# Altium PCB PCB_CONTROL.PcbDoc (part 8 of 15)
Units mil, origin at the board's own origin, x right, y up, seen from the top; angles counter-clockwise.
Board outline 7360.03 x 4773.15 mil, 2 copper layers (Top Layer, Bottom Layer); 73 components, 135 nets, 396 pads, 106 vias.
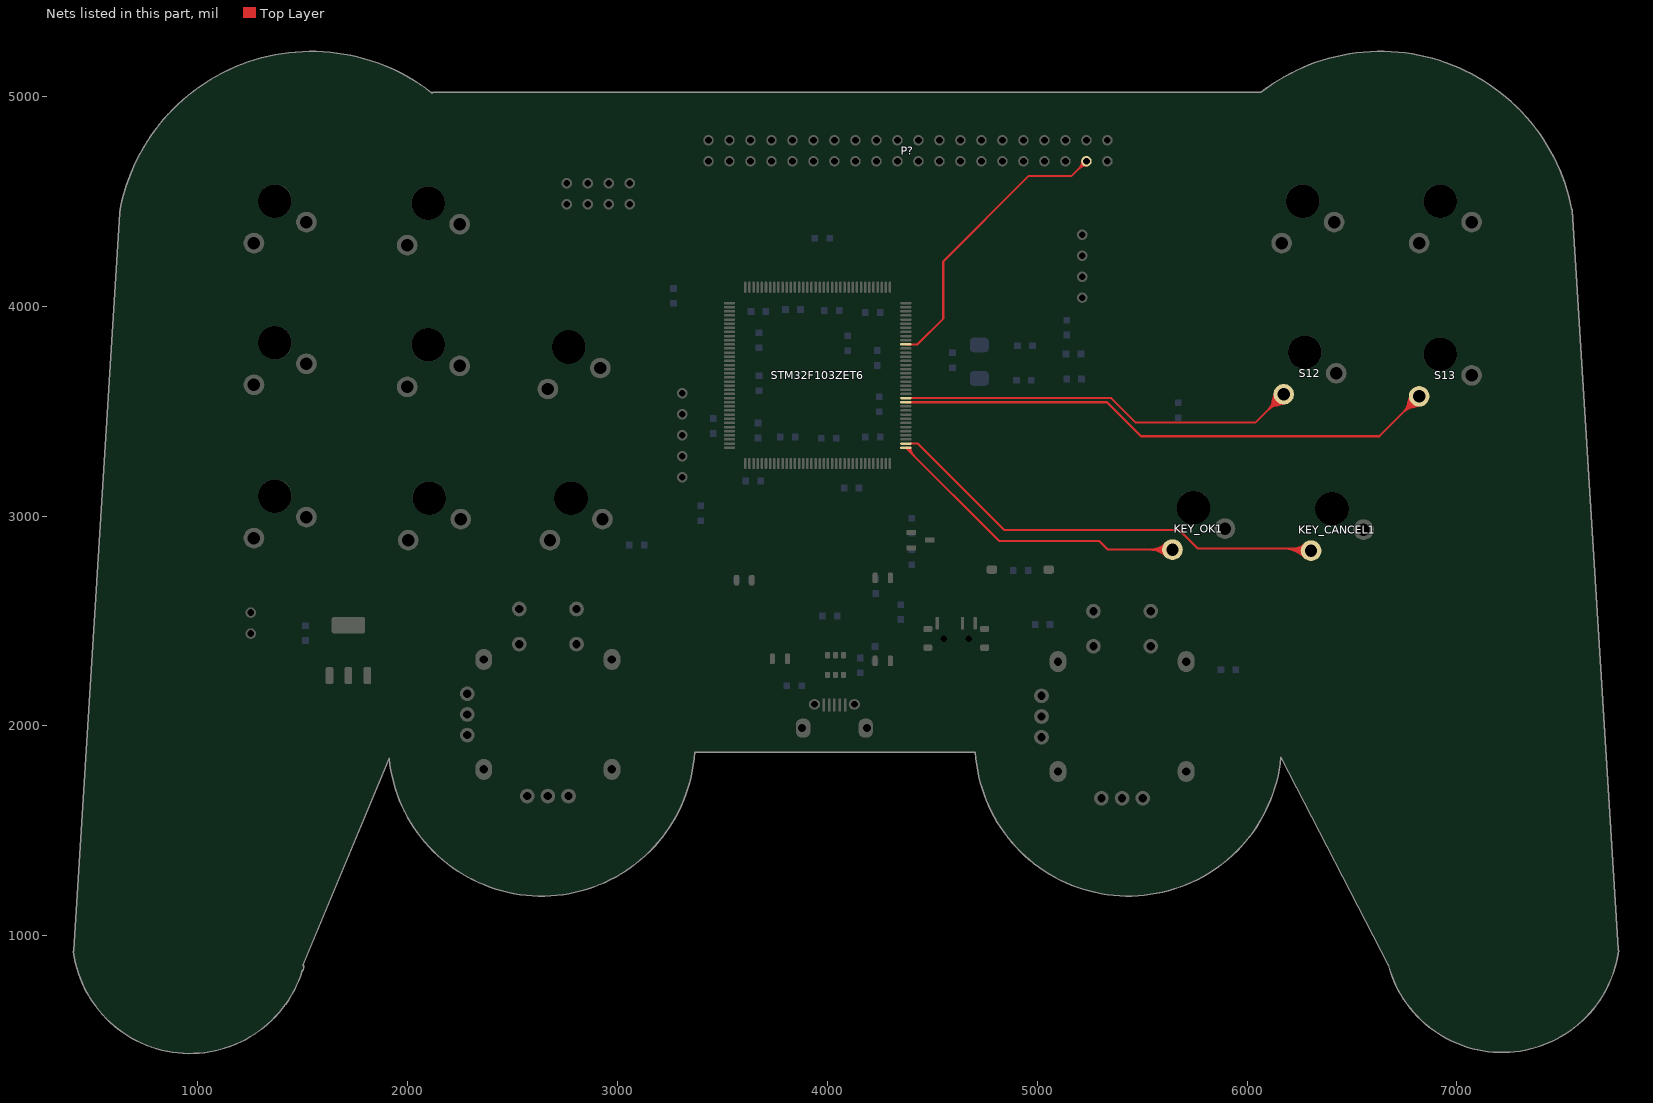
[diagram p8: the nets of this part, all layers, seen from the top]

## Via types
v1: diameter 20, hole 10, Top Layer to Bottom Layer, 104 vias
v2: diameter 30, hole 20, Top Layer to Bottom Layer, 2 vias

## Nets (pads, with @x,y where several pads share a name; then routed paths per layer and width w, separated by ;. In a path a pad name is that pad's centre, name@x,y a point inside that pad or via, vN(x,y) a via of type N, cw(c..) or ccw(c..) an arc to the next point about the centre after c; other vN are vias at no path point) (continued)
KEY_11: S12.2 STM32F103ZET6.13 | length 23886.4
  Top Layer w10: STM32F103ZET6.13@4375,3561.73 5353.27,3561.73 5470,3445 6040,3445 S12.2@6175,3580 ; STM32F103ZET6.13@4396,3561.73 4432,3561.73 ; STM32F103ZET6.13@4396,3561.73 4432,3561.73 ; STM32F103ZET6.13@4396,3561.73 4432,3561.73 ; 6099.52,3504.52 cw(c6175,3429.05) S12.2@6175,3535.79 ; 6099.52,3504.52 ccw(c6024.05,3580) S12.2@6130.79,3580 ; 6099.52,3504.52 ccw(c6024.05,3580) S12.2@6130.79,3580 ; 6099.52,3504.52 cw(c6175,3429.05) S12.2@6175,3535.79 ; 6099.52,3504.52 ccw(c6024.05,3580) S12.2@6130.79,3580 ; 6099.52,3504.52 cw(c6175,3429.05) S12.2@6175,3535.79 ; 6099.52,3504.52 ccw(c6024.05,3580) S12.2@6130.79,3580 ; 6099.52,3504.52 cw(c6175,3429.05) S12.2@6175,3535.79 ; 6099.52,3504.52 ccw(c6024.05,3580) S12.2@6130.79,3580 ; 6099.52,3504.52 cw(c6175,3429.05) S12.2@6175,3535.79 ; 6099.52,3504.52 ccw(c6024.05,3580) S12.2@6130.79,3580 ; 6099.52,3504.52 cw(c6175,3429.05) S12.2@6175,3535.79 ; 6099.52,3504.52 ccw(c6024.05,3580) S12.2@6130.79,3580 ; 6099.52,3504.52 cw(c6175,3429.05) S12.2@6175,3535.79 ; 6099.52,3504.52 ccw(c6024.05,3580) S12.2@6130.79,3580 ; 6099.52,3504.52 cw(c6175,3429.05) S12.2@6175,3535.79 ; 6116.6,3521.6 cw(c6175,3463.19) S12.2@6175,3545.79 ; 6116.6,3521.6 ccw(c6058.19,3580) S12.2@6140.79,3580 ; 6116.6,3521.6 ccw(c6058.19,3580) S12.2@6140.79,3580 ; 6116.6,3521.6 cw(c6175,3463.19) S12.2@6175,3545.79 ; 6116.6,3521.6 ccw(c6058.19,3580) S12.2@6140.79,3580 ; 6116.6,3521.6 cw(c6175,3463.19) S12.2@6175,3545.79 ; 6116.6,3521.6 ccw(c6058.19,3580) S12.2@6140.79,3580 ; 6116.6,3521.6 cw(c6175,3463.19) S12.2@6175,3545.79 ; 6116.6,3521.6 ccw(c6058.19,3580) S12.2@6140.79,3580 ; 6116.6,3521.6 cw(c6175,3463.19) S12.2@6175,3545.79 ; 6116.6,3521.6 ccw(c6058.19,3580) S12.2@6140.79,3580 ; 6116.6,3521.6 cw(c6175,3463.19) S12.2@6175,3545.79 ; 6116.6,3521.6 ccw(c6058.19,3580) S12.2@6140.79,3580 ; 6116.6,3521.6 cw(c6175,3463.19) S12.2@6175,3545.79 ; 6116.6,3521.6 ccw(c6058.19,3580) S12.2@6140.79,3580 ; 6116.6,3521.6 cw(c6175,3463.19) S12.2@6175,3545.79 ; 6118.29,3533.34 cw(c6188.4,3514.56) S12.2@6173.84,3585.67 ; 6118.29,3533.34 cw(c6188.4,3514.56) S12.2@6173.84,3585.67 ; 6118.29,3533.34 cw(c6188.4,3514.56) S12.2@6173.84,3585.67 ; 6118.29,3533.34 cw(c6188.4,3514.56) S12.2@6173.84,3585.67 ; 6118.29,3533.34 cw(c6188.4,3514.56) S12.2@6173.84,3585.67 ; 6118.29,3533.34 cw(c6188.4,3514.56) S12.2@6173.84,3585.67 ; 6118.29,3533.34 cw(c6188.4,3514.56) S12.2@6173.84,3585.67 ; 6118.29,3533.34 cw(c6188.4,3514.56) S12.2@6173.84,3585.67 ; 6118.29,3533.34 cw(c6188.4,3514.56) S12.2@6173.84,3585.67 ; 6118.29,3533.34 cw(c6188.4,3514.56) S12.2@6173.84,3585.67 ; 6118.29,3533.34 cw(c6188.4,3514.56) S12.2@6173.84,3585.67 ; 6118.29,3533.34 cw(c6188.4,3514.56) S12.2@6173.84,3585.67 ; 6118.29,3533.34 cw(c6188.4,3514.56) S12.2@6173.84,3585.67 ; 6118.29,3533.34 cw(c6188.4,3514.56) S12.2@6173.84,3585.67 ; 6118.29,3533.34 cw(c6188.4,3514.56) S12.2@6173.84,3585.67 ; 6118.29,3533.34 cw(c6188.4,3514.56) S12.2@6173.84,3585.67 ; 6118.29,3533.34 cw(c6188.4,3514.56) S12.2@6173.84,3585.67 ; 6118.29,3533.34 cw(c6188.4,3514.56) S12.2@6173.84,3585.67 ; 6118.29,3533.34 cw(c6188.4,3514.56) S12.2@6173.84,3585.67 ; 6118.29,3533.34 cw(c6188.4,3514.56) S12.2@6173.84,3585.67 ; 6118.29,3533.34 cw(c6188.4,3514.56) S12.2@6173.84,3585.67 ; 6118.29,3533.34 cw(c6188.4,3514.56) S12.2@6173.84,3585.67 ; 6118.29,3533.34 cw(c6188.4,3514.56) S12.2@6173.84,3585.67 ; 6118.29,3533.34 cw(c6188.4,3514.56) S12.2@6173.84,3585.67 ; 6118.29,3533.34 cw(c6188.4,3514.56) S12.2@6173.84,3585.67 ; 6118.29,3533.34 cw(c6188.4,3514.56) S12.2@6173.84,3585.67 ; 6118.29,3533.34 cw(c6188.4,3514.56) S12.2@6173.84,3585.67 ; 6118.29,3533.34 cw(c6188.4,3514.56) S12.2@6173.84,3585.67 ; 6122.47,3548.98 cw(c6184.77,3532.28) S12.2@6171.83,3595.47 ; 6122.47,3548.98 cw(c6184.77,3532.28) S12.2@6171.83,3595.47 ; 6122.47,3548.98 cw(c6184.77,3532.28) S12.2@6171.83,3595.47 ; 6122.47,3548.98 cw(c6184.77,3532.28) S12.2@6171.83,3595.47 ; 6122.47,3548.98 cw(c6184.77,3532.28) S12.2@6171.83,3595.47 ; 6122.47,3548.98 cw(c6184.77,3532.28) S12.2@6171.83,3595.47 ; 6122.47,3548.98 cw(c6184.77,3532.28) S12.2@6171.83,3595.47 ; 6122.47,3548.98 cw(c6184.77,3532.28) S12.2@6171.83,3595.47 ; 6122.47,3548.98 cw(c6184.77,3532.28) S12.2@6171.83,3595.47 ; 6122.47,3548.98 cw(c6184.77,3532.28) S12.2@6171.83,3595.47 ; 6122.47,3548.98 cw(c6184.77,3532.28) S12.2@6171.83,3595.47 ; 6122.47,3548.98 cw(c6184.77,3532.28) S12.2@6171.83,3595.47 ; 6122.47,3548.98 cw(c6184.77,3532.28) S12.2@6171.83,3595.47 ; 6122.47,3548.98 cw(c6184.77,3532.28) S12.2@6171.83,3595.47 ; 6122.47,3548.98 cw(c6184.77,3532.28) S12.2@6171.83,3595.47 ; 6122.47,3548.98 cw(c6184.77,3532.28) S12.2@6171.83,3595.47 ; 6122.47,3548.98 cw(c6184.77,3532.28) S12.2@6171.83,3595.47 ; 6122.47,3548.98 cw(c6184.77,3532.28) S12.2@6171.83,3595.47 ; 6122.47,3548.98 cw(c6184.77,3532.28) S12.2@6171.83,3595.47 ; 6122.47,3548.98 cw(c6184.77,3532.28) S12.2@6171.83,3595.47 ; 6122.47,3548.98 cw(c6184.77,3532.28) S12.2@6171.83,3595.47 ; 6122.47,3548.98 cw(c6184.77,3532.28) S12.2@6171.83,3595.47 ; 6122.47,3548.98 cw(c6184.77,3532.28) S12.2@6171.83,3595.47 ; 6122.47,3548.98 cw(c6184.77,3532.28) S12.2@6171.83,3595.47 ; 6122.47,3548.98 cw(c6184.77,3532.28) S12.2@6171.83,3595.47 ; 6122.47,3548.98 cw(c6184.77,3532.28) S12.2@6171.83,3595.47 ; 6122.47,3548.98 cw(c6184.77,3532.28) S12.2@6171.83,3595.47 ; 6122.47,3548.98 cw(c6184.77,3532.28) S12.2@6171.83,3595.47 ; 6126.66,3564.61 cw(c6181.14,3550.01) S12.2@6169.83,3605.26 ; 6126.66,3564.61 cw(c6181.14,3550.01) S12.2@6169.83,3605.26 ; 6126.66,3564.61 cw(c6181.14,3550.01) S12.2@6169.83,3605.26 ; 6126.66,3564.61 cw(c6181.14,3550.01) S12.2@6169.83,3605.26 ; 6126.66,3564.61 cw(c6181.14,3550.01) S12.2@6169.83,3605.26 ; 6126.66,3564.61 cw(c6181.14,3550.01) S12.2@6169.83,3605.26 ; 6126.66,3564.61 cw(c6181.14,3550.01) S12.2@6169.83,3605.26 ; 6126.66,3564.61 cw(c6181.14,3550.01) S12.2@6169.83,3605.26 ; 6126.66,3564.61 cw(c6181.14,3550.01) S12.2@6169.83,3605.26 ; 6126.66,3564.61 cw(c6181.14,3550.01) S12.2@6169.83,3605.26 ; 6126.66,3564.61 cw(c6181.14,3550.01) S12.2@6169.83,3605.26 ; 6126.66,3564.61 cw(c6181.14,3550.01) S12.2@6169.83,3605.26 ; 6126.66,3564.61 cw(c6181.14,3550.01) S12.2@6169.83,3605.26 ; 6126.66,3564.61 cw(c6181.14,3550.01) S12.2@6169.83,3605.26 ; 6126.66,3564.61 cw(c6181.14,3550.01) S12.2@6169.83,3605.26 ; 6126.66,3564.61 cw(c6181.14,3550.01) S12.2@6169.83,3605.26 ; 6126.66,3564.61 cw(c6181.14,3550.01) S12.2@6169.83,3605.26 ; 6126.66,3564.61 cw(c6181.14,3550.01) S12.2@6169.83,3605.26 ; 6126.66,3564.61 cw(c6181.14,3550.01) S12.2@6169.83,3605.26 ; 6126.66,3564.61 cw(c6181.14,3550.01) S12.2@6169.83,3605.26 ; 6126.66,3564.61 cw(c6181.14,3550.01) S12.2@6169.83,3605.26 ; 6126.66,3564.61 cw(c6181.14,3550.01) S12.2@6169.83,3605.26 ; 6126.66,3564.61 cw(c6181.14,3550.01) S12.2@6169.83,3605.26 ; 6126.66,3564.61 cw(c6181.14,3550.01) S12.2@6169.83,3605.26 ; 6126.66,3564.61 cw(c6181.14,3550.01) S12.2@6169.83,3605.26 ; 6126.66,3564.61 cw(c6181.14,3550.01) S12.2@6169.83,3605.26 ; 6126.66,3564.61 cw(c6181.14,3550.01) S12.2@6169.83,3605.26 ; 6126.66,3564.61 cw(c6181.14,3550.01) S12.2@6169.83,3605.26 ; 6128.34,3523.29 ccw(c6109.56,3593.4) S12.2@6180.67,3578.84 ; 6128.34,3523.29 ccw(c6109.56,3593.4) S12.2@6180.67,3578.84 ; 6128.34,3523.29 ccw(c6109.56,3593.4) S12.2@6180.67,3578.84 ; 6128.34,3523.29 ccw(c6109.56,3593.4) S12.2@6180.67,3578.84 ; 6128.34,3523.29 ccw(c6109.56,3593.4) S12.2@6180.67,3578.84 ; 6128.34,3523.29 ccw(c6109.56,3593.4) S12.2@6180.67,3578.84 ; 6128.34,3523.29 ccw(c6109.56,3593.4) S12.2@6180.67,3578.84 ; 6128.34,3523.29 ccw(c6109.56,3593.4) S12.2@6180.67,3578.84 ; 6128.34,3523.29 ccw(c6109.56,3593.4) S12.2@6180.67,3578.84 ; 6128.34,3523.29 ccw(c6109.56,3593.4) S12.2@6180.67,3578.84 ; 6128.34,3523.29 ccw(c6109.56,3593.4) S12.2@6180.67,3578.84 ; 6128.34,3523.29 ccw(c6109.56,3593.4) S12.2@6180.67,3578.84 ; 6128.34,3523.29 ccw(c6109.56,3593.4) S12.2@6180.67,3578.84 ; 6128.34,3523.29 ccw(c6109.56,3593.4) S12.2@6180.67,3578.84 ; 6128.34,3523.29 ccw(c6109.56,3593.4) S12.2@6180.67,3578.84 ; 6128.34,3523.29 ccw(c6109.56,3593.4) S12.2@6180.67,3578.84 ; 6128.34,3523.29 ccw(c6109.56,3593.4) S12.2@6180.67,3578.84 ; 6128.34,3523.29 ccw(c6109.56,3593.4) S12.2@6180.67,3578.84 ; 6128.34,3523.29 ccw(c6109.56,3593.4) S12.2@6180.67,3578.84 ; 6128.34,3523.29 ccw(c6109.56,3593.4) S12.2@6180.67,3578.84 ; 6128.34,3523.29 ccw(c6109.56,3593.4) S12.2@6180.67,3578.84 ; 6128.34,3523.29 ccw(c6109.56,3593.4) S12.2@6180.67,3578.84 ; 6128.34,3523.29 ccw(c6109.56,3593.4) S12.2@6180.67,3578.84 ; 6128.34,3523.29 ccw(c6109.56,3593.4) S12.2@6180.67,3578.84 ; 6128.34,3523.29 ccw(c6109.56,3593.4) S12.2@6180.67,3578.84 ; 6128.34,3523.29 ccw(c6109.56,3593.4) S12.2@6180.67,3578.84 ; 6128.34,3523.29 ccw(c6109.56,3593.4) S12.2@6180.67,3578.84 ; 6128.34,3523.29 ccw(c6109.56,3593.4) S12.2@6180.67,3578.84 ; 6129.49,3537.85 cw(c6179.14,3524.55) S12.2@6175.31,3575.8 ; 6129.49,3537.85 cw(c6179.14,3524.55) S12.2@6175.31,3575.8 ; 6129.49,3537.85 cw(c6179.14,3524.55) S12.2@6175.31,3575.8 ; 6129.49,3537.85 cw(c6179.14,3524.55) S12.2@6175.31,3575.8 ; 6129.49,3537.85 cw(c6179.14,3524.55) S12.2@6175.31,3575.8 ; 6129.49,3537.85 cw(c6179.14,3524.55) S12.2@6175.31,3575.8 ; 6129.49,3537.85 cw(c6179.14,3524.55) S12.2@6175.31,3575.8 ; 6129.49,3537.85 cw(c6179.14,3524.55) S12.2@6175.31,3575.8 ; 6129.49,3537.85 cw(c6179.14,3524.55) S12.2@6175.31,3575.8 ; 6129.49,3537.85 cw(c6179.14,3524.55) S12.2@6175.31,3575.8 ; 6129.49,3537.85 cw(c6179.14,3524.55) S12.2@6175.31,3575.8 ; 6129.49,3537.85 cw(c6179.14,3524.55) S12.2@6175.31,3575.8 ; 6129.49,3537.85 cw(c6179.14,3524.55) S12.2@6175.31,3575.8 ; 6129.49,3537.85 cw(c6179.14,3524.55) S12.2@6175.31,3575.8 ; 6129.49,3537.85 cw(c6179.14,3524.55) S12.2@6175.31,3575.8 ; 6129.49,3537.85 cw(c6179.14,3524.55) S12.2@6175.31,3575.8 ; 6129.49,3537.85 cw(c6179.14,3524.55) S12.2@6175.31,3575.8 ; 6129.49,3537.85 cw(c6179.14,3524.55) S12.2@6175.31,3575.8 ; 6129.49,3537.85 cw(c6179.14,3524.55) S12.2@6175.31,3575.8 ; 6129.49,3537.85 cw(c6179.14,3524.55) S12.2@6175.31,3575.8 ; 6129.49,3537.85 cw(c6179.14,3524.55) S12.2@6175.31,3575.8 ; 6129.49,3537.85 cw(c6179.14,3524.55) S12.2@6175.31,3575.8 ; 6129.49,3537.85 cw(c6179.14,3524.55) S12.2@6175.31,3575.8 ; 6129.49,3537.85 cw(c6179.14,3524.55) S12.2@6175.31,3575.8 ; 6129.49,3537.85 cw(c6179.14,3524.55) S12.2@6175.31,3575.8 ; 6129.49,3537.85 cw(c6179.14,3524.55) S12.2@6175.31,3575.8 ; 6129.49,3537.85 cw(c6179.14,3524.55) S12.2@6175.31,3575.8 ; 6129.49,3537.85 cw(c6179.14,3524.55) S12.2@6175.31,3575.8 ; 6132.85,3534.49 ccw(c6119.55,3584.14) S12.2@6170.8,3580.31 ; 6132.85,3534.49 ccw(c6119.55,3584.14) S12.2@6170.8,3580.31 ; 6132.85,3534.49 ccw(c6119.55,3584.14) S12.2@6170.8,3580.31 ; 6132.85,3534.49 ccw(c6119.55,3584.14) S12.2@6170.8,3580.31 ; 6132.85,3534.49 ccw(c6119.55,3584.14) S12.2@6170.8,3580.31 ; 6132.85,3534.49 ccw(c6119.55,3584.14) S12.2@6170.8,3580.31 ; 6132.85,3534.49 ccw(c6119.55,3584.14) S12.2@6170.8,3580.31 ; 6132.85,3534.49 ccw(c6119.55,3584.14) S12.2@6170.8,3580.31 ; 6132.85,3534.49 ccw(c6119.55,3584.14) S12.2@6170.8,3580.31 ; 6132.85,3534.49 ccw(c6119.55,3584.14) S12.2@6170.8,3580.31 ; 6132.85,3534.49 ccw(c6119.55,3584.14) S12.2@6170.8,3580.31 ; 6132.85,3534.49 ccw(c6119.55,3584.14) S12.2@6170.8,3580.31 ; 6132.85,3534.49 ccw(c6119.55,3584.14) S12.2@6170.8,3580.31 ; 6132.85,3534.49 ccw(c6119.55,3584.14) S12.2@6170.8,3580.31 ; 6132.85,3534.49 ccw(c6119.55,3584.14) S12.2@6170.8,3580.31 ; 6132.85,3534.49 ccw(c6119.55,3584.14) S12.2@6170.8,3580.31 ; 6132.85,3534.49 ccw(c6119.55,3584.14) S12.2@6170.8,3580.31 ; 6132.85,3534.49 ccw(c6119.55,3584.14) S12.2@6170.8,3580.31 ; 6132.85,3534.49 ccw(c6119.55,3584.14) S12.2@6170.8,3580.31 ; 6132.85,3534.49 ccw(c6119.55,3584.14) S12.2@6170.8,3580.31 ; 6132.85,3534.49 ccw(c6119.55,3584.14) S12.2@6170.8,3580.31 ; 6132.85,3534.49 ccw(c6119.55,3584.14) S12.2@6170.8,3580.31 ; 6132.85,3534.49 ccw(c6119.55,3584.14) S12.2@6170.8,3580.31 ; 6132.85,3534.49 ccw(c6119.55,3584.14) S12.2@6170.8,3580.31 ; 6132.85,3534.49 ccw(c6119.55,3584.14) S12.2@6170.8,3580.31 ; 6132.85,3534.49 ccw(c6119.55,3584.14) S12.2@6170.8,3580.31 ; 6132.85,3534.49 ccw(c6119.55,3584.14) S12.2@6170.8,3580.31 ; 6132.85,3534.49 ccw(c6119.55,3584.14) S12.2@6170.8,3580.31 ; 6133.14,3551.46 cw(c6178.03,3539.43) S12.2@6174.57,3585.77 ; 6133.14,3551.46 cw(c6178.03,3539.43) S12.2@6174.57,3585.77 ; 6133.14,3551.46 cw(c6178.03,3539.43) S12.2@6174.57,3585.77 ; 6133.14,3551.46 cw(c6178.03,3539.43) S12.2@6174.57,3585.77 ; 6133.14,3551.46 cw(c6178.03,3539.43) S12.2@6174.57,3585.77 ; 6133.14,3551.46 cw(c6178.03,3539.43) S12.2@6174.57,3585.77 ; 6133.14,3551.46 cw(c6178.03,3539.43) S12.2@6174.57,3585.77 ; 6133.14,3551.46 cw(c6178.03,3539.43) S12.2@6174.57,3585.77 ; 6133.14,3551.46 cw(c6178.03,3539.43) S12.2@6174.57,3585.77 ; 6133.14,3551.46 cw(c6178.03,3539.43) S12.2@6174.57,3585.77 ; 6133.14,3551.46 cw(c6178.03,3539.43) S12.2@6174.57,3585.77 ; 6133.14,3551.46 cw(c6178.03,3539.43) S12.2@6174.57,3585.77 ; 6133.14,3551.46 cw(c6178.03,3539.43) S12.2@6174.57,3585.77 ; 6133.14,3551.46 cw(c6178.03,3539.43) S12.2@6174.57,3585.77 ; 6133.14,3551.46 cw(c6178.03,3539.43) S12.2@6174.57,3585.77 ; 6133.14,3551.46 cw(c6178.03,3539.43) S12.2@6174.57,3585.77 ; 6133.14,3551.46 cw(c6178.03,3539.43) S12.2@6174.57,3585.77 ; 6133.14,3551.46 cw(c6178.03,3539.43) S12.2@6174.57,3585.77 ; 6133.14,3551.46 cw(c6178.03,3539.43) S12.2@6174.57,3585.77 ; 6133.14,3551.46 cw(c6178.03,3539.43) S12.2@6174.57,3585.77 ; 6133.14,3551.46 cw(c6178.03,3539.43) S12.2@6174.57,3585.77 ; 6133.14,3551.46 cw(c6178.03,3539.43) S12.2@6174.57,3585.77 ; 6133.14,3551.46 cw(c6178.03,3539.43) S12.2@6174.57,3585.77 ; 6133.14,3551.46 cw(c6178.03,3539.43) S12.2@6174.57,3585.77 ; 6133.14,3551.46 cw(c6178.03,3539.43) S12.2@6174.57,3585.77 ; 6133.14,3551.46 cw(c6178.03,3539.43) S12.2@6174.57,3585.77 ; 6133.14,3551.46 cw(c6178.03,3539.43) S12.2@6174.57,3585.77 ; 6133.14,3551.46 cw(c6178.03,3539.43) S12.2@6174.57,3585.77 ; 6133.67,3538.67 cw(c6175,3497.33) S12.2@6175,3555.79 ; 6133.67,3538.67 ccw(c6092.33,3580) S12.2@6150.79,3580 ; 6133.67,3538.67 ccw(c6092.33,3580) S12.2@6150.79,3580 ; 6133.67,3538.67 cw(c6175,3497.33) S12.2@6175,3555.79 ; 6133.67,3538.67 ccw(c6092.33,3580) S12.2@6150.79,3580 ; 6133.67,3538.67 cw(c6175,3497.33) S12.2@6175,3555.79 ; 6133.67,3538.67 ccw(c6092.33,3580) S12.2@6150.79,3580 ; 6133.67,3538.67 cw(c6175,3497.33) S12.2@6175,3555.79 ; 6133.67,3538.67 ccw(c6092.33,3580) S12.2@6150.79,3580 ; 6133.67,3538.67 cw(c6175,3497.33) S12.2@6175,3555.79 ; 6133.67,3538.67 ccw(c6092.33,3580) S12.2@6150.79,3580 ; 6133.67,3538.67 cw(c6175,3497.33) S12.2@6175,3555.79 ; 6133.67,3538.67 ccw(c6092.33,3580) S12.2@6150.79,3580 ; 6133.67,3538.67 cw(c6175,3497.33) S12.2@6175,3555.79 ; 6133.67,3538.67 ccw(c6092.33,3580) S12.2@6150.79,3580 ; 6133.67,3538.67 cw(c6175,3497.33) S12.2@6175,3555.79 ; 6143.98,3527.47 ccw(c6127.28,3589.77) S12.2@6190.47,3576.83 ; 6143.98,3527.47 ccw(c6127.28,3589.77) S12.2@6190.47,3576.83 ; 6143.98,3527.47 ccw(c6127.28,3589.77) S12.2@6190.47,3576.83 ; 6143.98,3527.47 ccw(c6127.28,3589.77) S12.2@6190.47,3576.83 ; 6143.98,3527.47 ccw(c6127.28,3589.77) S12.2@6190.47,3576.83 ; 6143.98,3527.47 ccw(c6127.28,3589.77) S12.2@6190.47,3576.83 ; 6143.98,3527.47 ccw(c6127.28,3589.77) S12.2@6190.47,3576.83 ; 6143.98,3527.47 ccw(c6127.28,3589.77) S12.2@6190.47,3576.83 ; 6143.98,3527.47 ccw(c6127.28,3589.77) S12.2@6190.47,3576.83 ; 6143.98,3527.47 ccw(c6127.28,3589.77) S12.2@6190.47,3576.83 ; 6143.98,3527.47 ccw(c6127.28,3589.77) S12.2@6190.47,3576.83 ; 6143.98,3527.47 ccw(c6127.28,3589.77) S12.2@6190.47,3576.83 ; 6143.98,3527.47 ccw(c6127.28,3589.77) S12.2@6190.47,3576.83 ; 6143.98,3527.47 ccw(c6127.28,3589.77) S12.2@6190.47,3576.83 ; 6143.98,3527.47 ccw(c6127.28,3589.77) S12.2@6190.47,3576.83 ; 6143.98,3527.47 ccw(c6127.28,3589.77) S12.2@6190.47,3576.83 ; 6143.98,3527.47 ccw(c6127.28,3589.77) S12.2@6190.47,3576.83 ; 6143.98,3527.47 ccw(c6127.28,3589.77) S12.2@6190.47,3576.83 ; 6143.98,3527.47 ccw(c6127.28,3589.77) S12.2@6190.47,3576.83 ; 6143.98,3527.47 ccw(c6127.28,3589.77) S12.2@6190.47,3576.83 ; 6143.98,3527.47 ccw(c6127.28,3589.77) S12.2@6190.47,3576.83 ; 6143.98,3527.47 ccw(c6127.28,3589.77) S12.2@6190.47,3576.83 ; 6143.98,3527.47 ccw(c6127.28,3589.77) S12.2@6190.47,3576.83 ; 6143.98,3527.47 ccw(c6127.28,3589.77) S12.2@6190.47,3576.83 ; 6143.98,3527.47 ccw(c6127.28,3589.77) S12.2@6190.47,3576.83 ; 6143.98,3527.47 ccw(c6127.28,3589.77) S12.2@6190.47,3576.83 ; 6143.98,3527.47 ccw(c6127.28,3589.77) S12.2@6190.47,3576.83 ; 6143.98,3527.47 ccw(c6127.28,3589.77) S12.2@6190.47,3576.83 ; 6146.46,3538.14 ccw(c6134.43,3583.03) S12.2@6180.77,3579.57 ; 6146.46,3538.14 ccw(c6134.43,3583.03) S12.2@6180.77,3579.57 ; 6146.46,3538.14 ccw(c6134.43,3583.03) S12.2@6180.77,3579.57 ; 6146.46,3538.14 ccw(c6134.43,3583.03) S12.2@6180.77,3579.57 ; 6146.46,3538.14 ccw(c6134.43,3583.03) S12.2@6180.77,3579.57 ; 6146.46,3538.14 ccw(c6134.43,3583.03) S12.2@6180.77,3579.57 ; 6146.46,3538.14 ccw(c6134.43,3583.03) S12.2@6180.77,3579.57 ; 6146.46,3538.14 ccw(c6134.43,3583.03) S12.2@6180.77,3579.57 ; 6146.46,3538.14 ccw(c6134.43,3583.03) S12.2@6180.77,3579.57 ; 6146.46,3538.14 ccw(c6134.43,3583.03) S12.2@6180.77,3579.57 ; 6146.46,3538.14 ccw(c6134.43,3583.03) S12.2@6180.77,3579.57 ; 6146.46,3538.14 ccw(c6134.43,3583.03) S12.2@6180.77,3579.57 ; 6146.46,3538.14 ccw(c6134.43,3583.03) S12.2@6180.77,3579.57 ; 6146.46,3538.14 ccw(c6134.43,3583.03) S12.2@6180.77,3579.57 ; 6146.46,3538.14 ccw(c6134.43,3583.03) S12.2@6180.77,3579.57 ; 6146.46,3538.14 ccw(c6134.43,3583.03) S12.2@6180.77,3579.57 ; 6146.46,3538.14 ccw(c6134.43,3583.03) S12.2@6180.77,3579.57 ; 6146.46,3538.14 ccw(c6134.43,3583.03) S12.2@6180.77,3579.57 ; 6146.46,3538.14 ccw(c6134.43,3583.03) S12.2@6180.77,3579.57 ; 6146.46,3538.14 ccw(c6134.43,3583.03) S12.2@6180.77,3579.57 ; 6146.46,3538.14 ccw(c6134.43,3583.03) S12.2@6180.77,3579.57 ; 6146.46,3538.14 ccw(c6134.43,3583.03) S12.2@6180.77,3579.57 ; 6146.46,3538.14 ccw(c6134.43,3583.03) S12.2@6180.77,3579.57 ; 6146.46,3538.14 ccw(c6134.43,3583.03) S12.2@6180.77,3579.57 ; 6146.46,3538.14 ccw(c6134.43,3583.03) S12.2@6180.77,3579.57 ; 6146.46,3538.14 ccw(c6134.43,3583.03) S12.2@6180.77,3579.57 ; 6146.46,3538.14 ccw(c6134.43,3583.03) S12.2@6180.77,3579.57 ; 6146.46,3538.14 ccw(c6134.43,3583.03) S12.2@6180.77,3579.57 ; 6159.61,3531.66 ccw(c6145.01,3586.14) S12.2@6200.26,3574.83 ; 6159.61,3531.66 ccw(c6145.01,3586.14) S12.2@6200.26,3574.83 ; 6159.61,3531.66 ccw(c6145.01,3586.14) S12.2@6200.26,3574.83 ; 6159.61,3531.66 ccw(c6145.01,3586.14) S12.2@6200.26,3574.83 ; 6159.61,3531.66 ccw(c6145.01,3586.14) S12.2@6200.26,3574.83 ; 6159.61,3531.66 ccw(c6145.01,3586.14) S12.2@6200.26,3574.83 ; 6159.61,3531.66 ccw(c6145.01,3586.14) S12.2@6200.26,3574.83 ; 6159.61,3531.66 ccw(c6145.01,3586.14) S12.2@6200.26,3574.83 ; 6159.61,3531.66 ccw(c6145.01,3586.14) S12.2@6200.26,3574.83 ; 6159.61,3531.66 ccw(c6145.01,3586.14) S12.2@6200.26,3574.83 ; 6159.61,3531.66 ccw(c6145.01,3586.14) S12.2@6200.26,3574.83 ; 6159.61,3531.66 ccw(c6145.01,3586.14) S12.2@6200.26,3574.83 ; 6159.61,3531.66 ccw(c6145.01,3586.14) S12.2@6200.26,3574.83 ; 6159.61,3531.66 ccw(c6145.01,3586.14) S12.2@6200.26,3574.83 ; 6159.61,3531.66 ccw(c6145.01,3586.14) S12.2@6200.26,3574.83 ; 6159.61,3531.66 ccw(c6145.01,3586.14) S12.2@6200.26,3574.83 ; 6159.61,3531.66 ccw(c6145.01,3586.14) S12.2@6200.26,3574.83 ; 6159.61,3531.66 ccw(c6145.01,3586.14) S12.2@6200.26,3574.83 ; 6159.61,3531.66 ccw(c6145.01,3586.14) S12.2@6200.26,3574.83 ; 6159.61,3531.66 ccw(c6145.01,3586.14) S12.2@6200.26,3574.83 ; 6159.61,3531.66 ccw(c6145.01,3586.14) S12.2@6200.26,3574.83 ; 6159.61,3531.66 ccw(c6145.01,3586.14) S12.2@6200.26,3574.83 ; 6159.61,3531.66 ccw(c6145.01,3586.14) S12.2@6200.26,3574.83 ; 6159.61,3531.66 ccw(c6145.01,3586.14) S12.2@6200.26,3574.83 ; 6159.61,3531.66 ccw(c6145.01,3586.14) S12.2@6200.26,3574.83 ; 6159.61,3531.66 ccw(c6145.01,3586.14) S12.2@6200.26,3574.83 ; 6159.61,3531.66 ccw(c6145.01,3586.14) S12.2@6200.26,3574.83 ; 6159.61,3531.66 ccw(c6145.01,3586.14) S12.2@6200.26,3574.83
KEY_12: S13.2 STM32F103ZET6.12 | length 24573
  Top Layer w10: STM32F103ZET6.12@4375,3542.05 5332.95,3542.05 5495,3380 6630,3380 S13.2@6820,3570 ; STM32F103ZET6.12@4396,3542.05 4432,3542.05 ; STM32F103ZET6.12@4396,3542.05 4432,3542.05 ; STM32F103ZET6.12@4396,3542.05 4432,3542.05 ; 6744.52,3494.52 cw(c6820,3419.05) S13.2@6820,3525.79 ; 6744.52,3494.52 ccw(c6669.05,3570) S13.2@6775.79,3570 ; 6744.52,3494.52 ccw(c6669.05,3570) S13.2@6775.79,3570 ; 6744.52,3494.52 cw(c6820,3419.05) S13.2@6820,3525.79 ; 6744.52,3494.52 ccw(c6669.05,3570) S13.2@6775.79,3570 ; 6744.52,3494.52 cw(c6820,3419.05) S13.2@6820,3525.79 ; 6744.52,3494.52 ccw(c6669.05,3570) S13.2@6775.79,3570 ; 6744.52,3494.52 cw(c6820,3419.05) S13.2@6820,3525.79 ; 6744.52,3494.52 ccw(c6669.05,3570) S13.2@6775.79,3570 ; 6744.52,3494.52 cw(c6820,3419.05) S13.2@6820,3525.79 ; 6744.52,3494.52 ccw(c6669.05,3570) S13.2@6775.79,3570 ; 6744.52,3494.52 cw(c6820,3419.05) S13.2@6820,3525.79 ; 6744.52,3494.52 ccw(c6669.05,3570) S13.2@6775.79,3570 ; 6744.52,3494.52 cw(c6820,3419.05) S13.2@6820,3525.79 ; 6744.52,3494.52 ccw(c6669.05,3570) S13.2@6775.79,3570 ; 6744.52,3494.52 cw(c6820,3419.05) S13.2@6820,3525.79 ; 6761.6,3511.6 cw(c6820,3453.19) S13.2@6820,3535.79 ; 6761.6,3511.6 ccw(c6703.19,3570) S13.2@6785.79,3570 ; 6761.6,3511.6 ccw(c6703.19,3570) S13.2@6785.79,3570 ; 6761.6,3511.6 cw(c6820,3453.19) S13.2@6820,3535.79 ; 6761.6,3511.6 ccw(c6703.19,3570) S13.2@6785.79,3570 ; 6761.6,3511.6 cw(c6820,3453.19) S13.2@6820,3535.79 ; 6761.6,3511.6 ccw(c6703.19,3570) S13.2@6785.79,3570 ; 6761.6,3511.6 cw(c6820,3453.19) S13.2@6820,3535.79 ; 6761.6,3511.6 ccw(c6703.19,3570) S13.2@6785.79,3570 ; 6761.6,3511.6 cw(c6820,3453.19) S13.2@6820,3535.79 ; 6761.6,3511.6 ccw(c6703.19,3570) S13.2@6785.79,3570 ; 6761.6,3511.6 cw(c6820,3453.19) S13.2@6820,3535.79 ; 6761.6,3511.6 ccw(c6703.19,3570) S13.2@6785.79,3570 ; 6761.6,3511.6 cw(c6820,3453.19) S13.2@6820,3535.79 ; 6761.6,3511.6 ccw(c6703.19,3570) S13.2@6785.79,3570 ; 6761.6,3511.6 cw(c6820,3453.19) S13.2@6820,3535.79 ; 6763.29,3523.34 cw(c6833.4,3504.56) S13.2@6818.84,3575.67 ; 6763.29,3523.34 cw(c6833.4,3504.56) S13.2@6818.84,3575.67 ; 6763.29,3523.34 cw(c6833.4,3504.56) S13.2@6818.84,3575.67 ; 6763.29,3523.34 cw(c6833.4,3504.56) S13.2@6818.84,3575.67 ; 6763.29,3523.34 cw(c6833.4,3504.56) S13.2@6818.84,3575.67 ; 6763.29,3523.34 cw(c6833.4,3504.56) S13.2@6818.84,3575.67 ; 6763.29,3523.34 cw(c6833.4,3504.56) S13.2@6818.84,3575.67 ; 6763.29,3523.34 cw(c6833.4,3504.56) S13.2@6818.84,3575.67 ; 6763.29,3523.34 cw(c6833.4,3504.56) S13.2@6818.84,3575.67 ; 6763.29,3523.34 cw(c6833.4,3504.56) S13.2@6818.84,3575.67 ; 6763.29,3523.34 cw(c6833.4,3504.56) S13.2@6818.84,3575.67 ; 6763.29,3523.34 cw(c6833.4,3504.56) S13.2@6818.84,3575.67 ; 6763.29,3523.34 cw(c6833.4,3504.56) S13.2@6818.84,3575.67 ; 6763.29,3523.34 cw(c6833.4,3504.56) S13.2@6818.84,3575.67 ; 6763.29,3523.34 cw(c6833.4,3504.56) S13.2@6818.84,3575.67 ; 6763.29,3523.34 cw(c6833.4,3504.56) S13.2@6818.84,3575.67 ; 6763.29,3523.34 cw(c6833.4,3504.56) S13.2@6818.84,3575.67 ; 6763.29,3523.34 cw(c6833.4,3504.56) S13.2@6818.84,3575.67 ; 6763.29,3523.34 cw(c6833.4,3504.56) S13.2@6818.84,3575.67 ; 6763.29,3523.34 cw(c6833.4,3504.56) S13.2@6818.84,3575.67 ; 6763.29,3523.34 cw(c6833.4,3504.56) S13.2@6818.84,3575.67 ; 6763.29,3523.34 cw(c6833.4,3504.56) S13.2@6818.84,3575.67 ; 6763.29,3523.34 cw(c6833.4,3504.56) S13.2@6818.84,3575.67 ; 6763.29,3523.34 cw(c6833.4,3504.56) S13.2@6818.84,3575.67 ; 6763.29,3523.34 cw(c6833.4,3504.56) S13.2@6818.84,3575.67 ; 6763.29,3523.34 cw(c6833.4,3504.56) S13.2@6818.84,3575.67 ; 6763.29,3523.34 cw(c6833.4,3504.56) S13.2@6818.84,3575.67 ; 6763.29,3523.34 cw(c6833.4,3504.56) S13.2@6818.84,3575.67 ; 6767.47,3538.98 cw(c6829.77,3522.28) S13.2@6816.83,3585.47 ; 6767.47,3538.98 cw(c6829.77,3522.28) S13.2@6816.83,3585.47 ; 6767.47,3538.98 cw(c6829.77,3522.28) S13.2@6816.83,3585.47 ; 6767.47,3538.98 cw(c6829.77,3522.28) S13.2@6816.83,3585.47 ; 6767.47,3538.98 cw(c6829.77,3522.28) S13.2@6816.83,3585.47 ; 6767.47,3538.98 cw(c6829.77,3522.28) S13.2@6816.83,3585.47 ; 6767.47,3538.98 cw(c6829.77,3522.28) S13.2@6816.83,3585.47 ; 6767.47,3538.98 cw(c6829.77,3522.28) S13.2@6816.83,3585.47 ; 6767.47,3538.98 cw(c6829.77,3522.28) S13.2@6816.83,3585.47 ; 6767.47,3538.98 cw(c6829.77,3522.28) S13.2@6816.83,3585.47 ; 6767.47,3538.98 cw(c6829.77,3522.28) S13.2@6816.83,3585.47 ; 6767.47,3538.98 cw(c6829.77,3522.28) S13.2@6816.83,3585.47 ; 6767.47,3538.98 cw(c6829.77,3522.28) S13.2@6816.83,3585.47 ; 6767.47,3538.98 cw(c6829.77,3522.28) S13.2@6816.83,3585.47 ; 6767.47,3538.98 cw(c6829.77,3522.28) S13.2@6816.83,3585.47 ; 6767.47,3538.98 cw(c6829.77,3522.28) S13.2@6816.83,3585.47 ; 6767.47,3538.98 cw(c6829.77,3522.28) S13.2@6816.83,3585.47 ; 6767.47,3538.98 cw(c6829.77,3522.28) S13.2@6816.83,3585.47 ; 6767.47,3538.98 cw(c6829.77,3522.28) S13.2@6816.83,3585.47 ; 6767.47,3538.98 cw(c6829.77,3522.28) S13.2@6816.83,3585.47 ; 6767.47,3538.98 cw(c6829.77,3522.28) S13.2@6816.83,3585.47 ; 6767.47,3538.98 cw(c6829.77,3522.28) S13.2@6816.83,3585.47 ; 6767.47,3538.98 cw(c6829.77,3522.28) S13.2@6816.83,3585.47 ; 6767.47,3538.98 cw(c6829.77,3522.28) S13.2@6816.83,3585.47 ; 6767.47,3538.98 cw(c6829.77,3522.28) S13.2@6816.83,3585.47 ; 6767.47,3538.98 cw(c6829.77,3522.28) S13.2@6816.83,3585.47 ; 6767.47,3538.98 cw(c6829.77,3522.28) S13.2@6816.83,3585.47 ; 6767.47,3538.98 cw(c6829.77,3522.28) S13.2@6816.83,3585.47 ; 6771.66,3554.61 cw(c6826.14,3540.01) S13.2@6814.83,3595.26 ; 6771.66,3554.61 cw(c6826.14,3540.01) S13.2@6814.83,3595.26 ; 6771.66,3554.61 cw(c6826.14,3540.01) S13.2@6814.83,3595.26 ; 6771.66,3554.61 cw(c6826.14,3540.01) S13.2@6814.83,3595.26 ; 6771.66,3554.61 cw(c6826.14,3540.01) S13.2@6814.83,3595.26 ; 6771.66,3554.61 cw(c6826.14,3540.01) S13.2@6814.83,3595.26 ; 6771.66,3554.61 cw(c6826.14,3540.01) S13.2@6814.83,3595.26 ; 6771.66,3554.61 cw(c6826.14,3540.01) S13.2@6814.83,3595.26 ; 6771.66,3554.61 cw(c6826.14,3540.01) S13.2@6814.83,3595.26 ; 6771.66,3554.61 cw(c6826.14,3540.01) S13.2@6814.83,3595.26 ; 6771.66,3554.61 cw(c6826.14,3540.01) S13.2@6814.83,3595.26 ; 6771.66,3554.61 cw(c6826.14,3540.01) S13.2@6814.83,3595.26 ; 6771.66,3554.61 cw(c6826.14,3540.01) S13.2@6814.83,3595.26 ; 6771.66,3554.61 cw(c6826.14,3540.01) S13.2@6814.83,3595.26 ; 6771.66,3554.61 cw(c6826.14,3540.01) S13.2@6814.83,3595.26 ; 6771.66,3554.61 cw(c6826.14,3540.01) S13.2@6814.83,3595.26 ; 6771.66,3554.61 cw(c6826.14,3540.01) S13.2@6814.83,3595.26 ; 6771.66,3554.61 cw(c6826.14,3540.01) S13.2@6814.83,3595.26 ; 6771.66,3554.61 cw(c6826.14,3540.01) S13.2@6814.83,3595.26 ; 6771.66,3554.61 cw(c6826.14,3540.01) S13.2@6814.83,3595.26 ; 6771.66,3554.61 cw(c6826.14,3540.01) S13.2@6814.83,3595.26 ; 6771.66,3554.61 cw(c6826.14,3540.01) S13.2@6814.83,3595.26 ; 6771.66,3554.61 cw(c6826.14,3540.01) S13.2@6814.83,3595.26 ; 6771.66,3554.61 cw(c6826.14,3540.01) S13.2@6814.83,3595.26 ; 6771.66,3554.61 cw(c6826.14,3540.01) S13.2@6814.83,3595.26 ; 6771.66,3554.61 cw(c6826.14,3540.01) S13.2@6814.83,3595.26 ; 6771.66,3554.61 cw(c6826.14,3540.01) S13.2@6814.83,3595.26 ; 6771.66,3554.61 cw(c6826.14,3540.01) S13.2@6814.83,3595.26 ; 6773.34,3513.29 ccw(c6754.56,3583.4) S13.2@6825.67,3568.84 ; 6773.34,3513.29 ccw(c6754.56,3583.4) S13.2@6825.67,3568.84 ; 6773.34,3513.29 ccw(c6754.56,3583.4) S13.2@6825.67,3568.84 ; 6773.34,3513.29 ccw(c6754.56,3583.4) S13.2@6825.67,3568.84 ; 6773.34,3513.29 ccw(c6754.56,3583.4) S13.2@6825.67,3568.84 ; 6773.34,3513.29 ccw(c6754.56,3583.4) S13.2@6825.67,3568.84 ; 6773.34,3513.29 ccw(c6754.56,3583.4) S13.2@6825.67,3568.84 ; 6773.34,3513.29 ccw(c6754.56,3583.4) S13.2@6825.67,3568.84 ; 6773.34,3513.29 ccw(c6754.56,3583.4) S13.2@6825.67,3568.84 ; 6773.34,3513.29 ccw(c6754.56,3583.4) S13.2@6825.67,3568.84 ; 6773.34,3513.29 ccw(c6754.56,3583.4) S13.2@6825.67,3568.84 ; 6773.34,3513.29 ccw(c6754.56,3583.4) S13.2@6825.67,3568.84 ; 6773.34,3513.29 ccw(c6754.56,3583.4) S13.2@6825.67,3568.84 ; 6773.34,3513.29 ccw(c6754.56,3583.4) S13.2@6825.67,3568.84 ; 6773.34,3513.29 ccw(c6754.56,3583.4) S13.2@6825.67,3568.84 ; 6773.34,3513.29 ccw(c6754.56,3583.4) S13.2@6825.67,3568.84 ; 6773.34,3513.29 ccw(c6754.56,3583.4) S13.2@6825.67,3568.84 ; 6773.34,3513.29 ccw(c6754.56,3583.4) S13.2@6825.67,3568.84 ; 6773.34,3513.29 ccw(c6754.56,3583.4) S13.2@6825.67,3568.84 ; 6773.34,3513.29 ccw(c6754.56,3583.4) S13.2@6825.67,3568.84 ; 6773.34,3513.29 ccw(c6754.56,3583.4) S13.2@6825.67,3568.84 ; 6773.34,3513.29 ccw(c6754.56,3583.4) S13.2@6825.67,3568.84 ; 6773.34,3513.29 ccw(c6754.56,3583.4) S13.2@6825.67,3568.84 ; 6773.34,3513.29 ccw(c6754.56,3583.4) S13.2@6825.67,3568.84 ; 6773.34,3513.29 ccw(c6754.56,3583.4) S13.2@6825.67,3568.84 ; 6773.34,3513.29 ccw(c6754.56,3583.4) S13.2@6825.67,3568.84 ; 6773.34,3513.29 ccw(c6754.56,3583.4) S13.2@6825.67,3568.84 ; 6773.34,3513.29 ccw(c6754.56,3583.4) S13.2@6825.67,3568.84 ; 6774.49,3527.85 cw(c6824.14,3514.55) S13.2@6820.31,3565.8 ; 6774.49,3527.85 cw(c6824.14,3514.55) S13.2@6820.31,3565.8 ; 6774.49,3527.85 cw(c6824.14,3514.55) S13.2@6820.31,3565.8 ; 6774.49,3527.85 cw(c6824.14,3514.55) S13.2@6820.31,3565.8 ; 6774.49,3527.85 cw(c6824.14,3514.55) S13.2@6820.31,3565.8 ; 6774.49,3527.85 cw(c6824.14,3514.55) S13.2@6820.31,3565.8 ; 6774.49,3527.85 cw(c6824.14,3514.55) S13.2@6820.31,3565.8 ; 6774.49,3527.85 cw(c6824.14,3514.55) S13.2@6820.31,3565.8 ; 6774.49,3527.85 cw(c6824.14,3514.55) S13.2@6820.31,3565.8 ; 6774.49,3527.85 cw(c6824.14,3514.55) S13.2@6820.31,3565.8 ; 6774.49,3527.85 cw(c6824.14,3514.55) S13.2@6820.31,3565.8 ; 6774.49,3527.85 cw(c6824.14,3514.55) S13.2@6820.31,3565.8 ; 6774.49,3527.85 cw(c6824.14,3514.55) S13.2@6820.31,3565.8 ; 6774.49,3527.85 cw(c6824.14,3514.55) S13.2@6820.31,3565.8 ; 6774.49,3527.85 cw(c6824.14,3514.55) S13.2@6820.31,3565.8 ; 6774.49,3527.85 cw(c6824.14,3514.55) S13.2@6820.31,3565.8 ; 6774.49,3527.85 cw(c6824.14,3514.55) S13.2@6820.31,3565.8 ; 6774.49,3527.85 cw(c6824.14,3514.55) S13.2@6820.31,3565.8 ; 6774.49,3527.85 cw(c6824.14,3514.55) S13.2@6820.31,3565.8 ; 6774.49,3527.85 cw(c6824.14,3514.55) S13.2@6820.31,3565.8 ; 6774.49,3527.85 cw(c6824.14,3514.55) S13.2@6820.31,3565.8 ; 6774.49,3527.85 cw(c6824.14,3514.55) S13.2@6820.31,3565.8 ; 6774.49,3527.85 cw(c6824.14,3514.55) S13.2@6820.31,3565.8 ; 6774.49,3527.85 cw(c6824.14,3514.55) S13.2@6820.31,3565.8 ; 6774.49,3527.85 cw(c6824.14,3514.55) S13.2@6820.31,3565.8 ; 6774.49,3527.85 cw(c6824.14,3514.55) S13.2@6820.31,3565.8 ; 6774.49,3527.85 cw(c6824.14,3514.55) S13.2@6820.31,3565.8 ; 6774.49,3527.85 cw(c6824.14,3514.55) S13.2@6820.31,3565.8 ; 6777.85,3524.49 ccw(c6764.55,3574.14) S13.2@6815.8,3570.31 ; 6777.85,3524.49 ccw(c6764.55,3574.14) S13.2@6815.8,3570.31 ; 6777.85,3524.49 ccw(c6764.55,3574.14) S13.2@6815.8,3570.31 ; 6777.85,3524.49 ccw(c6764.55,3574.14) S13.2@6815.8,3570.31 ; 6777.85,3524.49 ccw(c6764.55,3574.14) S13.2@6815.8,3570.31 ; 6777.85,3524.49 ccw(c6764.55,3574.14) S13.2@6815.8,3570.31 ; 6777.85,3524.49 ccw(c6764.55,3574.14) S13.2@6815.8,3570.31 ; 6777.85,3524.49 ccw(c6764.55,3574.14) S13.2@6815.8,3570.31 ; 6777.85,3524.49 ccw(c6764.55,3574.14) S13.2@6815.8,3570.31 ; 6777.85,3524.49 ccw(c6764.55,3574.14) S13.2@6815.8,3570.31 ; 6777.85,3524.49 ccw(c6764.55,3574.14) S13.2@6815.8,3570.31 ; 6777.85,3524.49 ccw(c6764.55,3574.14) S13.2@6815.8,3570.31 ; 6777.85,3524.49 ccw(c6764.55,3574.14) S13.2@6815.8,3570.31 ; 6777.85,3524.49 ccw(c6764.55,3574.14) S13.2@6815.8,3570.31 ; 6777.85,3524.49 ccw(c6764.55,3574.14) S13.2@6815.8,3570.31 ; 6777.85,3524.49 ccw(c6764.55,3574.14) S13.2@6815.8,3570.31 ; 6777.85,3524.49 ccw(c6764.55,3574.14) S13.2@6815.8,3570.31 ; 6777.85,3524.49 ccw(c6764.55,3574.14) S13.2@6815.8,3570.31 ; 6777.85,3524.49 ccw(c6764.55,3574.14) S13.2@6815.8,3570.31 ; 6777.85,3524.49 ccw(c6764.55,3574.14) S13.2@6815.8,3570.31 ; 6777.85,3524.49 ccw(c6764.55,3574.14) S13.2@6815.8,3570.31 ; 6777.85,3524.49 ccw(c6764.55,3574.14) S13.2@6815.8,3570.31 ; 6777.85,3524.49 ccw(c6764.55,3574.14) S13.2@6815.8,3570.31 ; 6777.85,3524.49 ccw(c6764.55,3574.14) S13.2@6815.8,3570.31 ; 6777.85,3524.49 ccw(c6764.55,3574.14) S13.2@6815.8,3570.31 ; 6777.85,3524.49 ccw(c6764.55,3574.14) S13.2@6815.8,3570.31 ; 6777.85,3524.49 ccw(c6764.55,3574.14) S13.2@6815.8,3570.31 ; 6777.85,3524.49 ccw(c6764.55,3574.14) S13.2@6815.8,3570.31 ; 6778.14,3541.46 cw(c6823.03,3529.43) S13.2@6819.57,3575.77 ; 6778.14,3541.46 cw(c6823.03,3529.43) S13.2@6819.57,3575.77 ; 6778.14,3541.46 cw(c6823.03,3529.43) S13.2@6819.57,3575.77 ; 6778.14,3541.46 cw(c6823.03,3529.43) S13.2@6819.57,3575.77 ; 6778.14,3541.46 cw(c6823.03,3529.43) S13.2@6819.57,3575.77 ; 6778.14,3541.46 cw(c6823.03,3529.43) S13.2@6819.57,3575.77 ; 6778.14,3541.46 cw(c6823.03,3529.43) S13.2@6819.57,3575.77 ; 6778.14,3541.46 cw(c6823.03,3529.43) S13.2@6819.57,3575.77 ; 6778.14,3541.46 cw(c6823.03,3529.43) S13.2@6819.57,3575.77 ; 6778.14,3541.46 cw(c6823.03,3529.43) S13.2@6819.57,3575.77 ; 6778.14,3541.46 cw(c6823.03,3529.43) S13.2@6819.57,3575.77 ; 6778.14,3541.46 cw(c6823.03,3529.43) S13.2@6819.57,3575.77 ; 6778.14,3541.46 cw(c6823.03,3529.43) S13.2@6819.57,3575.77 ; 6778.14,3541.46 cw(c6823.03,3529.43) S13.2@6819.57,3575.77 ; 6778.14,3541.46 cw(c6823.03,3529.43) S13.2@6819.57,3575.77 ; 6778.14,3541.46 cw(c6823.03,3529.43) S13.2@6819.57,3575.77 ; 6778.14,3541.46 cw(c6823.03,3529.43) S13.2@6819.57,3575.77 ; 6778.14,3541.46 cw(c6823.03,3529.43) S13.2@6819.57,3575.77 ; 6778.14,3541.46 cw(c6823.03,3529.43) S13.2@6819.57,3575.77 ; 6778.14,3541.46 cw(c6823.03,3529.43) S13.2@6819.57,3575.77 ; 6778.14,3541.46 cw(c6823.03,3529.43) S13.2@6819.57,3575.77 ; 6778.14,3541.46 cw(c6823.03,3529.43) S13.2@6819.57,3575.77 ; 6778.14,3541.46 cw(c6823.03,3529.43) S13.2@6819.57,3575.77 ; 6778.14,3541.46 cw(c6823.03,3529.43) S13.2@6819.57,3575.77 ; 6778.14,3541.46 cw(c6823.03,3529.43) S13.2@6819.57,3575.77 ; 6778.14,3541.46 cw(c6823.03,3529.43) S13.2@6819.57,3575.77 ; 6778.14,3541.46 cw(c6823.03,3529.43) S13.2@6819.57,3575.77 ; 6778.14,3541.46 cw(c6823.03,3529.43) S13.2@6819.57,3575.77 ; 6778.67,3528.67 cw(c6820,3487.33) S13.2@6820,3545.79 ; 6778.67,3528.67 ccw(c6737.33,3570) S13.2@6795.79,3570 ; 6778.67,3528.67 ccw(c6737.33,3570) S13.2@6795.79,3570 ; 6778.67,3528.67 cw(c6820,3487.33) S13.2@6820,3545.79 ; 6778.67,3528.67 ccw(c6737.33,3570) S13.2@6795.79,3570 ; 6778.67,3528.67 cw(c6820,3487.33) S13.2@6820,3545.79 ; 6778.67,3528.67 ccw(c6737.33,3570) S13.2@6795.79,3570 ; 6778.67,3528.67 cw(c6820,3487.33) S13.2@6820,3545.79 ; 6778.67,3528.67 ccw(c6737.33,3570) S13.2@6795.79,3570 ; 6778.67,3528.67 cw(c6820,3487.33) S13.2@6820,3545.79 ; 6778.67,3528.67 ccw(c6737.33,3570) S13.2@6795.79,3570 ; 6778.67,3528.67 cw(c6820,3487.33) S13.2@6820,3545.79 ; 6778.67,3528.67 ccw(c6737.33,3570) S13.2@6795.79,3570 ; 6778.67,3528.67 cw(c6820,3487.33) S13.2@6820,3545.79 ; 6778.67,3528.67 ccw(c6737.33,3570) S13.2@6795.79,3570 ; 6778.67,3528.67 cw(c6820,3487.33) S13.2@6820,3545.79 ; 6788.98,3517.47 ccw(c6772.28,3579.77) S13.2@6835.47,3566.83 ; 6788.98,3517.47 ccw(c6772.28,3579.77) S13.2@6835.47,3566.83 ; 6788.98,3517.47 ccw(c6772.28,3579.77) S13.2@6835.47,3566.83 ; 6788.98,3517.47 ccw(c6772.28,3579.77) S13.2@6835.47,3566.83 ; 6788.98,3517.47 ccw(c6772.28,3579.77) S13.2@6835.47,3566.83 ; 6788.98,3517.47 ccw(c6772.28,3579.77) S13.2@6835.47,3566.83 ; 6788.98,3517.47 ccw(c6772.28,3579.77) S13.2@6835.47,3566.83 ; 6788.98,3517.47 ccw(c6772.28,3579.77) S13.2@6835.47,3566.83 ; 6788.98,3517.47 ccw(c6772.28,3579.77) S13.2@6835.47,3566.83 ; 6788.98,3517.47 ccw(c6772.28,3579.77) S13.2@6835.47,3566.83 ; 6788.98,3517.47 ccw(c6772.28,3579.77) S13.2@6835.47,3566.83 ; 6788.98,3517.47 ccw(c6772.28,3579.77) S13.2@6835.47,3566.83 ; 6788.98,3517.47 ccw(c6772.28,3579.77) S13.2@6835.47,3566.83 ; 6788.98,3517.47 ccw(c6772.28,3579.77) S13.2@6835.47,3566.83 ; 6788.98,3517.47 ccw(c6772.28,3579.77) S13.2@6835.47,3566.83 ; 6788.98,3517.47 ccw(c6772.28,3579.77) S13.2@6835.47,3566.83 ; 6788.98,3517.47 ccw(c6772.28,3579.77) S13.2@6835.47,3566.83 ; 6788.98,3517.47 ccw(c6772.28,3579.77) S13.2@6835.47,3566.83 ; 6788.98,3517.47 ccw(c6772.28,3579.77) S13.2@6835.47,3566.83 ; 6788.98,3517.47 ccw(c6772.28,3579.77) S13.2@6835.47,3566.83 ; 6788.98,3517.47 ccw(c6772.28,3579.77) S13.2@6835.47,3566.83 ; 6788.98,3517.47 ccw(c6772.28,3579.77) S13.2@6835.47,3566.83 ; 6788.98,3517.47 ccw(c6772.28,3579.77) S13.2@6835.47,3566.83 ; 6788.98,3517.47 ccw(c6772.28,3579.77) S13.2@6835.47,3566.83 ; 6788.98,3517.47 ccw(c6772.28,3579.77) S13.2@6835.47,3566.83 ; 6788.98,3517.47 ccw(c6772.28,3579.77) S13.2@6835.47,3566.83 ; 6788.98,3517.47 ccw(c6772.28,3579.77) S13.2@6835.47,3566.83 ; 6788.98,3517.47 ccw(c6772.28,3579.77) S13.2@6835.47,3566.83 ; 6791.46,3528.14 ccw(c6779.43,3573.03) S13.2@6825.77,3569.57 ; 6791.46,3528.14 ccw(c6779.43,3573.03) S13.2@6825.77,3569.57 ; 6791.46,3528.14 ccw(c6779.43,3573.03) S13.2@6825.77,3569.57 ; 6791.46,3528.14 ccw(c6779.43,3573.03) S13.2@6825.77,3569.57 ; 6791.46,3528.14 ccw(c6779.43,3573.03) S13.2@6825.77,3569.57 ; 6791.46,3528.14 ccw(c6779.43,3573.03) S13.2@6825.77,3569.57 ; 6791.46,3528.14 ccw(c6779.43,3573.03) S13.2@6825.77,3569.57 ; 6791.46,3528.14 ccw(c6779.43,3573.03) S13.2@6825.77,3569.57 ; 6791.46,3528.14 ccw(c6779.43,3573.03) S13.2@6825.77,3569.57 ; 6791.46,3528.14 ccw(c6779.43,3573.03) S13.2@6825.77,3569.57 ; 6791.46,3528.14 ccw(c6779.43,3573.03) S13.2@6825.77,3569.57 ; 6791.46,3528.14 ccw(c6779.43,3573.03) S13.2@6825.77,3569.57 ; 6791.46,3528.14 ccw(c6779.43,3573.03) S13.2@6825.77,3569.57 ; 6791.46,3528.14 ccw(c6779.43,3573.03) S13.2@6825.77,3569.57 ; 6791.46,3528.14 ccw(c6779.43,3573.03) S13.2@6825.77,3569.57 ; 6791.46,3528.14 ccw(c6779.43,3573.03) S13.2@6825.77,3569.57 ; 6791.46,3528.14 ccw(c6779.43,3573.03) S13.2@6825.77,3569.57 ; 6791.46,3528.14 ccw(c6779.43,3573.03) S13.2@6825.77,3569.57 ; 6791.46,3528.14 ccw(c6779.43,3573.03) S13.2@6825.77,3569.57 ; 6791.46,3528.14 ccw(c6779.43,3573.03) S13.2@6825.77,3569.57 ; 6791.46,3528.14 ccw(c6779.43,3573.03) S13.2@6825.77,3569.57 ; 6791.46,3528.14 ccw(c6779.43,3573.03) S13.2@6825.77,3569.57 ; 6791.46,3528.14 ccw(c6779.43,3573.03) S13.2@6825.77,3569.57 ; 6791.46,3528.14 ccw(c6779.43,3573.03) S13.2@6825.77,3569.57 ; 6791.46,3528.14 ccw(c6779.43,3573.03) S13.2@6825.77,3569.57 ; 6791.46,3528.14 ccw(c6779.43,3573.03) S13.2@6825.77,3569.57 ; 6791.46,3528.14 ccw(c6779.43,3573.03) S13.2@6825.77,3569.57 ; 6791.46,3528.14 ccw(c6779.43,3573.03) S13.2@6825.77,3569.57 ; 6804.61,3521.66 ccw(c6790.01,3576.14) S13.2@6845.26,3564.83 ; 6804.61,3521.66 ccw(c6790.01,3576.14) S13.2@6845.26,3564.83 ; 6804.61,3521.66 ccw(c6790.01,3576.14) S13.2@6845.26,3564.83 ; 6804.61,3521.66 ccw(c6790.01,3576.14) S13.2@6845.26,3564.83 ; 6804.61,3521.66 ccw(c6790.01,3576.14) S13.2@6845.26,3564.83 ; 6804.61,3521.66 ccw(c6790.01,3576.14) S13.2@6845.26,3564.83 ; 6804.61,3521.66 ccw(c6790.01,3576.14) S13.2@6845.26,3564.83 ; 6804.61,3521.66 ccw(c6790.01,3576.14) S13.2@6845.26,3564.83 ; 6804.61,3521.66 ccw(c6790.01,3576.14) S13.2@6845.26,3564.83 ; 6804.61,3521.66 ccw(c6790.01,3576.14) S13.2@6845.26,3564.83 ; 6804.61,3521.66 ccw(c6790.01,3576.14) S13.2@6845.26,3564.83 ; 6804.61,3521.66 ccw(c6790.01,3576.14) S13.2@6845.26,3564.83 ; 6804.61,3521.66 ccw(c6790.01,3576.14) S13.2@6845.26,3564.83 ; 6804.61,3521.66 ccw(c6790.01,3576.14) S13.2@6845.26,3564.83 ; 6804.61,3521.66 ccw(c6790.01,3576.14) S13.2@6845.26,3564.83 ; 6804.61,3521.66 ccw(c6790.01,3576.14) S13.2@6845.26,3564.83 ; 6804.61,3521.66 ccw(c6790.01,3576.14) S13.2@6845.26,3564.83 ; 6804.61,3521.66 ccw(c6790.01,3576.14) S13.2@6845.26,3564.83 ; 6804.61,3521.66 ccw(c6790.01,3576.14) S13.2@6845.26,3564.83 ; 6804.61,3521.66 ccw(c6790.01,3576.14) S13.2@6845.26,3564.83 ; 6804.61,3521.66 ccw(c6790.01,3576.14) S13.2@6845.26,3564.83 ; 6804.61,3521.66 ccw(c6790.01,3576.14) S13.2@6845.26,3564.83 ; 6804.61,3521.66 ccw(c6790.01,3576.14) S13.2@6845.26,3564.83 ; 6804.61,3521.66 ccw(c6790.01,3576.14) S13.2@6845.26,3564.83 ; 6804.61,3521.66 ccw(c6790.01,3576.14) S13.2@6845.26,3564.83 ; 6804.61,3521.66 ccw(c6790.01,3576.14) S13.2@6845.26,3564.83 ; 6804.61,3521.66 ccw(c6790.01,3576.14) S13.2@6845.26,3564.83 ; 6804.61,3521.66 ccw(c6790.01,3576.14) S13.2@6845.26,3564.83
KEY_CANCEL: KEY_CANCEL1.2 STM32F103ZET6.2 | length 2616.2
  Top Layer w10: 6174.12,2845 cw(c6174.12,2704.12) KEY_CANCEL1.2@6273.74,2803.74 ; 6198.26,2845 cw(c6198.26,2728.26) KEY_CANCEL1.2@6280.81,2810.81 ; KEY_CANCEL1.2@6273.74,2866.26 cw(c6222.4,2917.6) 6222.4,2845 cw(c6222.4,2752.4) KEY_CANCEL1.2@6287.88,2817.88 ; KEY_CANCEL1.2@6280.81,2859.19 cw(c6246.55,2893.45) 6246.55,2845 cw(c6246.55,2776.55) KEY_CANCEL1.2@6294.95,2824.95 ; KEY_CANCEL1.2@6305,2835 6295,2845 5765,2845 5676.4,2933.6 4843.6,2933.6 4432,3345.2 ; STM32F103ZET6.2@4396,3345.2 4432,3345.2 ; STM32F103ZET6.2@4396,3345.2 4432,3345.2 ; STM32F103ZET6.2@4396,3345.2 4432,3345.2
KEY_OK: KEY_OK1.2 STM32F103ZET6.1 | length 5131
  Top Layer w10: STM32F103ZET6.1@4375,3325.51 4819.51,2881 5296.63,2881 5337.63,2840 KEY_OK1.2@5645,2840 ; STM32F103ZET6.1@4377,3325.51 ccw(c4381.83,3325.51) STM32F103ZET6.1@4378.41,3322.1 ; STM32F103ZET6.1@4377,3325.51 ccw(c4381.83,3325.51) STM32F103ZET6.1@4378.41,3322.1 ; STM32F103ZET6.1@4377,3325.51 ccw(c4381.83,3325.51) STM32F103ZET6.1@4378.41,3322.1 ; STM32F103ZET6.1@4377,3325.51 ccw(c4381.83,3325.51) STM32F103ZET6.1@4378.41,3322.1 ; STM32F103ZET6.1@4377,3325.51 ccw(c4381.83,3325.51) STM32F103ZET6.1@4378.41,3322.1 ; STM32F103ZET6.1@4377,3325.51 ccw(c4381.83,3325.51) STM32F103ZET6.1@4378.41,3322.1 ; STM32F103ZET6.1@4377,3325.51 ccw(c4381.83,3325.51) STM32F103ZET6.1@4378.41,3322.1 ; STM32F103ZET6.1@4377,3325.51 ccw(c4381.83,3325.51) STM32F103ZET6.1@4378.41,3322.1 ; STM32F103ZET6.1@4387,3325.51 ccw(c4415.97,3325.51) 4395.49,3305.03 ; STM32F103ZET6.1@4387,3325.51 ccw(c4415.97,3325.51) 4395.49,3305.03 ; STM32F103ZET6.1@4387,3325.51 ccw(c4415.97,3325.51) 4395.49,3305.03 ; STM32F103ZET6.1@4387,3325.51 ccw(c4415.97,3325.51) 4395.49,3305.03 ; STM32F103ZET6.1@4387,3325.51 ccw(c4415.97,3325.51) 4395.49,3305.03 ; STM32F103ZET6.1@4387,3325.51 ccw(c4415.97,3325.51) 4395.49,3305.03 ; STM32F103ZET6.1@4387,3325.51 ccw(c4415.97,3325.51) 4395.49,3305.03 ; STM32F103ZET6.1@4387,3325.51 ccw(c4415.97,3325.51) 4395.49,3305.03 ; STM32F103ZET6.1@4397,3325.51 ccw(c4450.11,3325.51) 4412.56,3287.96 ; STM32F103ZET6.1@4397,3325.51 ccw(c4450.11,3325.51) 4412.56,3287.96 ; STM32F103ZET6.1@4397,3325.51 ccw(c4450.11,3325.51) 4412.56,3287.96 ; STM32F103ZET6.1@4397,3325.51 ccw(c4450.11,3325.51) 4412.56,3287.96 ; STM32F103ZET6.1@4397,3325.51 ccw(c4450.11,3325.51) 4412.56,3287.96 ; STM32F103ZET6.1@4397,3325.51 ccw(c4450.11,3325.51) 4412.56,3287.96 ; STM32F103ZET6.1@4397,3325.51 ccw(c4450.11,3325.51) 4412.56,3287.96 ; STM32F103ZET6.1@4397,3325.51 ccw(c4450.11,3325.51) 4412.56,3287.96 ; 5538.26,2840 cw(c5538.26,2733.26) KEY_OK1.2@5613.74,2808.74 ; 5538.26,2840 ccw(c5538.26,2946.74) KEY_OK1.2@5613.74,2871.26 ; 5538.26,2840 ccw(c5538.26,2946.74) KEY_OK1.2@5613.74,2871.26 ; 5538.26,2840 cw(c5538.26,2733.26) KEY_OK1.2@5613.74,2808.74 ; 5538.26,2840 ccw(c5538.26,2946.74) KEY_OK1.2@5613.74,2871.26 ; 5538.26,2840 cw(c5538.26,2733.26) KEY_OK1.2@5613.74,2808.74 ; 5538.26,2840 ccw(c5538.26,2946.74) KEY_OK1.2@5613.74,2871.26 ; 5538.26,2840 cw(c5538.26,2733.26) KEY_OK1.2@5613.74,2808.74 ; 5538.26,2840 ccw(c5538.26,2946.74) KEY_OK1.2@5613.74,2871.26 ; 5538.26,2840 cw(c5538.26,2733.26) KEY_OK1.2@5613.74,2808.74 ; 5538.26,2840 ccw(c5538.26,2946.74) KEY_OK1.2@5613.74,2871.26 ; 5538.26,2840 cw(c5538.26,2733.26) KEY_OK1.2@5613.74,2808.74 ; 5538.26,2840 ccw(c5538.26,2946.74) KEY_OK1.2@5613.74,2871.26 ; 5538.26,2840 cw(c5538.26,2733.26) KEY_OK1.2@5613.74,2808.74 ; 5538.26,2840 ccw(c5538.26,2946.74) KEY_OK1.2@5613.74,2871.26 ; 5538.26,2840 cw(c5538.26,2733.26) KEY_OK1.2@5613.74,2808.74 ; 5562.4,2840 cw(c5562.4,2757.4) KEY_OK1.2@5620.81,2815.81 ; 5562.4,2840 ccw(c5562.4,2922.6) KEY_OK1.2@5620.81,2864.19 ; 5562.4,2840 ccw(c5562.4,2922.6) KEY_OK1.2@5620.81,2864.19 ; 5562.4,2840 cw(c5562.4,2757.4) KEY_OK1.2@5620.81,2815.81 ; 5562.4,2840 ccw(c5562.4,2922.6) KEY_OK1.2@5620.81,2864.19 ; 5562.4,2840 cw(c5562.4,2757.4) KEY_OK1.2@5620.81,2815.81 ; 5562.4,2840 ccw(c5562.4,2922.6) KEY_OK1.2@5620.81,2864.19 ; 5562.4,2840 cw(c5562.4,2757.4) KEY_OK1.2@5620.81,2815.81 ; 5562.4,2840 ccw(c5562.4,2922.6) KEY_OK1.2@5620.81,2864.19 ; 5562.4,2840 cw(c5562.4,2757.4) KEY_OK1.2@5620.81,2815.81 ; 5562.4,2840 ccw(c5562.4,2922.6) KEY_OK1.2@5620.81,2864.19 ; 5562.4,2840 cw(c5562.4,2757.4) KEY_OK1.2@5620.81,2815.81 ; 5562.4,2840 ccw(c5562.4,2922.6) KEY_OK1.2@5620.81,2864.19 ; 5562.4,2840 cw(c5562.4,2757.4) KEY_OK1.2@5620.81,2815.81 ; 5562.4,2840 ccw(c5562.4,2922.6) KEY_OK1.2@5620.81,2864.19 ; 5562.4,2840 cw(c5562.4,2757.4) KEY_OK1.2@5620.81,2815.81 ; 5586.55,2840 cw(c5586.55,2781.55) KEY_OK1.2@5627.88,2822.88 ; 5586.55,2840 ccw(c5586.55,2898.45) KEY_OK1.2@5627.88,2857.12 ; 5586.55,2840 ccw(c5586.55,2898.45) KEY_OK1.2@5627.88,2857.12 ; 5586.55,2840 cw(c5586.55,2781.55) KEY_OK1.2@5627.88,2822.88 ; 5586.55,2840 ccw(c5586.55,2898.45) KEY_OK1.2@5627.88,2857.12 ; 5586.55,2840 cw(c5586.55,2781.55) KEY_OK1.2@5627.88,2822.88 ; 5586.55,2840 ccw(c5586.55,2898.45) KEY_OK1.2@5627.88,2857.12 ; 5586.55,2840 cw(c5586.55,2781.55) KEY_OK1.2@5627.88,2822.88 ; 5586.55,2840 ccw(c5586.55,2898.45) KEY_OK1.2@5627.88,2857.12 ; 5586.55,2840 cw(c5586.55,2781.55) KEY_OK1.2@5627.88,2822.88 ; 5586.55,2840 ccw(c5586.55,2898.45) KEY_OK1.2@5627.88,2857.12 ; 5586.55,2840 cw(c5586.55,2781.55) KEY_OK1.2@5627.88,2822.88 ; 5586.55,2840 ccw(c5586.55,2898.45) KEY_OK1.2@5627.88,2857.12 ; 5586.55,2840 cw(c5586.55,2781.55) KEY_OK1.2@5627.88,2822.88 ; 5586.55,2840 ccw(c5586.55,2898.45) KEY_OK1.2@5627.88,2857.12 ; 5586.55,2840 cw(c5586.55,2781.55) KEY_OK1.2@5627.88,2822.88
LED_A: P?.37 STM32F103ZET6.26 | length 2148.6
  Top Layer w10: STM32F103ZET6.26@4375,3817.64 4430.52,3817.64 4553,3940.12 4553,4212.49 4960.51,4620 5165,4620 P?.37@5235,4690 ; 5200.86,4655.86 cw(c5235,4621.72) P?.37@5235,4670 ; 5200.86,4655.86 ccw(c5166.72,4690) P?.37@5215,4690 ; 5200.86,4655.86 ccw(c5166.72,4690) P?.37@5215,4690 ; 5200.86,4655.86 cw(c5235,4621.72) P?.37@5235,4670 ; 5200.86,4655.86 ccw(c5166.72,4690) P?.37@5215,4690 ; 5200.86,4655.86 cw(c5235,4621.72) P?.37@5235,4670 ; 5200.86,4655.86 ccw(c5166.72,4690) P?.37@5215,4690 ; 5200.86,4655.86 cw(c5235,4621.72) P?.37@5235,4670 ; 5208.25,4664.8 cw(c5242.01,4655.76) P?.37@5235,4690 ; 5208.25,4664.8 cw(c5242.01,4655.76) P?.37@5235,4690 ; 5208.25,4664.8 cw(c5242.01,4655.76) P?.37@5235,4690 ; 5208.25,4664.8 cw(c5242.01,4655.76) P?.37@5235,4690 ; 5208.25,4664.8 cw(c5242.01,4655.76) P?.37@5235,4690 ; 5208.25,4664.8 cw(c5242.01,4655.76) P?.37@5235,4690 ; 5209.8,4663.25 ccw(c5200.76,4697.01) P?.37@5235,4690 ; 5209.8,4663.25 ccw(c5200.76,4697.01) P?.37@5235,4690 ; 5209.8,4663.25 ccw(c5200.76,4697.01) P?.37@5235,4690 ; 5209.8,4663.25 ccw(c5200.76,4697.01) P?.37@5235,4690 ; 5209.8,4663.25 ccw(c5200.76,4697.01) P?.37@5235,4690 ; 5209.8,4663.25 ccw(c5200.76,4697.01) P?.37@5235,4690